# Altium PCB PICkit_2.PcbDoc (part 2 of 2)
Units mil, origin at the board's own origin, x right, y up, seen from the top; angles counter-clockwise.
Board outline 6000 x 4000 mil, 2 copper layers (Top Layer, Bottom Layer); 48 components, 38 nets, 142 pads, 0 vias.
Unrouted connection lines stored in the file: 48.
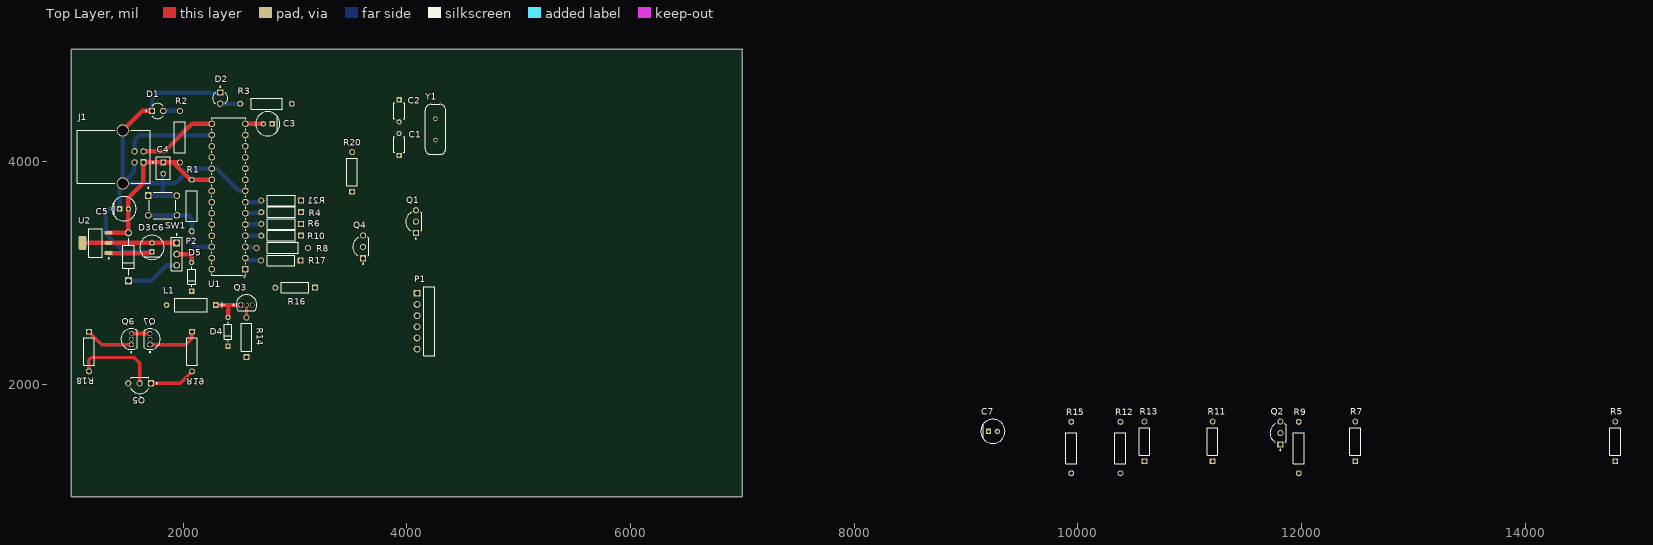
[diagram p0: Top Layer view]

## Part data (continued)
R14: library part CMP-1659-00075-1, "Axial Resistor, 1 KOhm, +/- 1%, 250 mW, -55 to 155 degC, 2-Pin THD, RoHS, Bulk", Case/Package=Axial, Manufacturer=Yageo, Max Operating Temperature="155 degC", Max Power Dissipation=250mW, Min Operating Temperature="-55 degC", Package Quantity=200, Power Rating="250 mW", Resistance=1k, Resistor Type="Metal Film", Supplier Part Number 1=1.00KXBK-ND, Temperature Coefficient=100ppm/°C, Tolerance=1%, Voltage Rating="250 V", Voltage Rating (DC)=200V, Case\Package=Axial, Category="Through-Hole Resistors", ComponentLink1Description="Manufacturer URL", ComponentLink1URL=http://www.yageo.com/, ComponentLink2Description=Datasheet, ComponentLink2URL=http://www.yageo.com/documents/recent/Yageo%20LR_MFR_2013.pdf, ComponentLink3Description=https://datasheet.ciiva.com/25646/yageolr-mfr-2013-25646206.pdf?src-supplier=Digi-Key, ComponentLink3URL=https://datasheet.ciiva.com/25646/yageolr-mfr-2013-25646206.pdf?src-supplier=Digi-Key, DatasheetVersion=Apr-13, Lead Diameter=0.6mm, Lead Free="Lead Free", Length="0.248 inch", Manufacturer Part Number=MFR-25FBF52-1K, Mount="Through Hole", Number of Terminations=2, PackageDescription="2-Pin Axial Lead, Dia 2.4 mm, Body Length 6.3 mm", PackageReference=MFR-25, Packaging=Bulk, Pricing 1="1=0.10000, 10=0.08100, 25=0.05600, 50=0.04360, 100=0.03110, 250=0.02428, 500=0.01928, 1000=0.01369, 5000=0.01058 (USD)", RoHS=Yes, RoHS Compliant=Yes, RoHSCompliant=true, Series=MFR, Stock 1=104756, Supplier 1=Digi-Key, Termination=Axial, Width=6.3mm
R16: library part CMP-1659-00075-1, "Axial Resistor, 1 KOhm, +/- 1%, 250 mW, -55 to 155 degC, 2-Pin THD, RoHS, Bulk", Case/Package=Axial, Manufacturer=Yageo, Max Operating Temperature="155 degC", Max Power Dissipation=250mW, Min Operating Temperature="-55 degC", Package Quantity=200, Power Rating="250 mW", Resistance=820R, Resistor Type="Metal Film", Supplier Part Number 1=1.00KXBK-ND, Temperature Coefficient=100ppm/°C, Tolerance=1%, Voltage Rating="250 V", Voltage Rating (DC)=200V, Case\Package=Axial, Category="Through-Hole Resistors", ComponentLink1Description="Manufacturer URL", ComponentLink1URL=http://www.yageo.com/, ComponentLink2Description=Datasheet, ComponentLink2URL=http://www.yageo.com/documents/recent/Yageo%20LR_MFR_2013.pdf, ComponentLink3Description=https://datasheet.ciiva.com/25646/yageolr-mfr-2013-25646206.pdf?src-supplier=Digi-Key, ComponentLink3URL=https://datasheet.ciiva.com/25646/yageolr-mfr-2013-25646206.pdf?src-supplier=Digi-Key, DatasheetVersion=Apr-13, Lead Diameter=0.6mm, Lead Free="Lead Free", Length="0.248 inch", Manufacturer Part Number=MFR-25FBF52-1K, Mount="Through Hole", Number of Terminations=2, PackageDescription="2-Pin Axial Lead, Dia 2.4 mm, Body Length 6.3 mm", PackageReference=MFR-25, Packaging=Bulk, Pricing 1="1=0.10000, 10=0.08100, 25=0.05600, 50=0.04360, 100=0.03110, 250=0.02428, 500=0.01928, 1000=0.01369, 5000=0.01058 (USD)", RoHS=Yes, RoHS Compliant=Yes, RoHSCompliant=true, Series=MFR, Stock 1=104756, Supplier 1=Digi-Key, Termination=Axial, Width=6.3mm
R17: library part CMP-1659-00075-1, "Axial Resistor, 1 KOhm, +/- 1%, 250 mW, -55 to 155 degC, 2-Pin THD, RoHS, Bulk", Case/Package=Axial, Manufacturer=Yageo, Max Operating Temperature="155 degC", Max Power Dissipation=250mW, Min Operating Temperature="-55 degC", Package Quantity=200, Power Rating="250 mW", Resistance=2k7, Resistor Type="Metal Film", Supplier Part Number 1=1.00KXBK-ND, Temperature Coefficient=100ppm/°C, Tolerance=1%, Voltage Rating="250 V", Voltage Rating (DC)=200V, Case\Package=Axial, Category="Through-Hole Resistors", ComponentLink1Description="Manufacturer URL", ComponentLink1URL=http://www.yageo.com/, ComponentLink2Description=Datasheet, ComponentLink2URL=http://www.yageo.com/documents/recent/Yageo%20LR_MFR_2013.pdf, ComponentLink3Description=https://datasheet.ciiva.com/25646/yageolr-mfr-2013-25646206.pdf?src-supplier=Digi-Key, ComponentLink3URL=https://datasheet.ciiva.com/25646/yageolr-mfr-2013-25646206.pdf?src-supplier=Digi-Key, DatasheetVersion=Apr-13, Lead Diameter=0.6mm, Lead Free="Lead Free", Length="0.248 inch", Manufacturer Part Number=MFR-25FBF52-1K, Mount="Through Hole", Number of Terminations=2, PackageDescription="2-Pin Axial Lead, Dia 2.4 mm, Body Length 6.3 mm", PackageReference=MFR-25, Packaging=Bulk, Pricing 1="1=0.10000, 10=0.08100, 25=0.05600, 50=0.04360, 100=0.03110, 250=0.02428, 500=0.01928, 1000=0.01369, 5000=0.01058 (USD)", RoHS=Yes, RoHS Compliant=Yes, RoHSCompliant=true, Series=MFR, Stock 1=104756, Supplier 1=Digi-Key, Termination=Axial, Width=6.3mm
R18 R20 R21: library part CMP-1659-00075-1, "Axial Resistor, 1 KOhm, +/- 1%, 250 mW, -55 to 155 degC, 2-Pin THD, RoHS, Bulk", Case/Package=Axial, Manufacturer=Yageo, Max Operating Temperature="155 degC", Max Power Dissipation=250mW, Min Operating Temperature="-55 degC", Package Quantity=200, Power Rating="250 mW", Resistance=10k, Resistor Type="Metal Film", Supplier Part Number 1=1.00KXBK-ND, Temperature Coefficient=100ppm/°C, Tolerance=1%, Voltage Rating="250 V", Voltage Rating (DC)=200V, Case\Package=Axial, Category="Through-Hole Resistors", ComponentLink1Description="Manufacturer URL", ComponentLink1URL=http://www.yageo.com/, ComponentLink2Description=Datasheet, ComponentLink2URL=http://www.yageo.com/documents/recent/Yageo%20LR_MFR_2013.pdf, ComponentLink3Description=https://datasheet.ciiva.com/25646/yageolr-mfr-2013-25646206.pdf?src-supplier=Digi-Key, ComponentLink3URL=https://datasheet.ciiva.com/25646/yageolr-mfr-2013-25646206.pdf?src-supplier=Digi-Key, DatasheetVersion=Apr-13, Lead Diameter=0.6mm, Lead Free="Lead Free", Length="0.248 inch", Manufacturer Part Number=MFR-25FBF52-1K, Mount="Through Hole", Number of Terminations=2, PackageDescription="2-Pin Axial Lead, Dia 2.4 mm, Body Length 6.3 mm", PackageReference=MFR-25, Packaging=Bulk, Pricing 1="1=0.10000, 10=0.08100, 25=0.05600, 50=0.04360, 100=0.03110, 250=0.02428, 500=0.01928, 1000=0.01369, 5000=0.01058 (USD)", RoHS=Yes, RoHS Compliant=Yes, RoHSCompliant=true, Series=MFR, Stock 1=104756, Supplier 1=Digi-Key, Termination=Axial, Width=6.3mm
R19: library part CMP-1659-00075-1, "Axial Resistor, 1 KOhm, +/- 1%, 250 mW, -55 to 155 degC, 2-Pin THD, RoHS, Bulk", Case/Package=Axial, Manufacturer=Yageo, Max Operating Temperature="155 degC", Max Power Dissipation=250mW, Min Operating Temperature="-55 degC", Package Quantity=200, Power Rating="250 mW", Resistance=100R, Resistor Type="Metal Film", Supplier Part Number 1=1.00KXBK-ND, Temperature Coefficient=100ppm/°C, Tolerance=1%, Voltage Rating="250 V", Voltage Rating (DC)=200V, Case\Package=Axial, Category="Through-Hole Resistors", ComponentLink1Description="Manufacturer URL", ComponentLink1URL=http://www.yageo.com/, ComponentLink2Description=Datasheet, ComponentLink2URL=http://www.yageo.com/documents/recent/Yageo%20LR_MFR_2013.pdf, ComponentLink3Description=https://datasheet.ciiva.com/25646/yageolr-mfr-2013-25646206.pdf?src-supplier=Digi-Key, ComponentLink3URL=https://datasheet.ciiva.com/25646/yageolr-mfr-2013-25646206.pdf?src-supplier=Digi-Key, DatasheetVersion=Apr-13, Lead Diameter=0.6mm, Lead Free="Lead Free", Length="0.248 inch", Manufacturer Part Number=MFR-25FBF52-1K, Mount="Through Hole", Number of Terminations=2, PackageDescription="2-Pin Axial Lead, Dia 2.4 mm, Body Length 6.3 mm", PackageReference=MFR-25, Packaging=Bulk, Pricing 1="1=0.10000, 10=0.08100, 25=0.05600, 50=0.04360, 100=0.03110, 250=0.02428, 500=0.01928, 1000=0.01369, 5000=0.01058 (USD)", RoHS=Yes, RoHS Compliant=Yes, RoHSCompliant=true, Series=MFR, Stock 1=104756, Supplier 1=Digi-Key, Termination=Axial, Width=6.3mm
SW1: "6 x 6 mm, 4.3 ~ 17 mm Actuator Height, 100 ~ 260 gf, Through Hole, SPST, Tactile Switch", Manufacturer="CUI Devices", Supplier Part Number 1=2223-TS02-66-60-BK-100-LCR-D-ND, Category="Tactile Switches", Manufacturer Part Number=TS02-66-60-BK-100-LCR-D, Pricing 1="1=0.10000, 10=0.10000, 25=0.09440, 100=0.08580, 250=0.08068, 500=0.07384, 1000=0.06181, 3000=0.06009, 5000=0.05666 (USD)", RoHS=No, Stock 1=949, Supplier 1=Digi-Key
U1: "Microcontroller, 32 Kb Flash, 2048 Ram, 256 EEPROM, 24 I/o, SPDIP-28", Case/Package=DIP, Frequency=48MHz, Manufacturer=Microchip, Max Operating Temperature=85°C, Max Power Dissipation=1W, Max Supply Voltage=5.5V, Min Operating Temperature=-40°C, Min Supply Voltage=4.2V, Nominal Supply Current=1.1mA, Package Quantity=15, Supplier Part Number 1=PIC18F2550-I/SP-ND, Access Time=48us, Address Bus Width=8b, Category=Microcontrollers, ComponentLink1Description=https://datasheet.ciiva.com/19459/2177651-19459972.pdf?src-supplier=Jameco, ComponentLink1URL=https://datasheet.ciiva.com/19459/2177651-19459972.pdf?src-supplier=Jameco, ComponentLink2Description=https://datasheet.ciiva.com/14131/cepic18f25-data-en-14131789.pdf?src-supplier=Distrelec, ComponentLink2URL=https://datasheet.ciiva.com/14131/cepic18f25-data-en-14131789.pdf?src-supplier=Distrelec, ComponentLink3Description=https://datasheet.ciiva.com/7774/39632e-7774525.pdf?src-supplier=Element14, ComponentLink3URL=https://datasheet.ciiva.com/7774/39632e-7774525.pdf?src-supplier=Element14, ComponentLink4Description=https://datasheet.ciiva.com/7180/720550-7180953.pdf?src-supplier=Newark, ComponentLink4URL=https://datasheet.ciiva.com/7180/720550-7180953.pdf?src-supplier=Newark, ComponentLink5Description=https://datasheet.ciiva.com/9244/39632d-9244668.pdf?src-supplier=Avnet, ComponentLink5URL=https://datasheet.ciiva.com/9244/39632d-9244668.pdf?src-supplier=Avnet, ComponentLink6Description=https://datasheet.ciiva.com/1494/39632e-1494161.pdf?src-supplier=Digi-Key, ComponentLink6URL=https://datasheet.ciiva.com/1494/39632e-1494161.pdf?src-supplier=Digi-Key, Copyright="Copyright (C) 2023 Ultra Librarian. All rights reserved.", Core Architecture=PIC, Data Bus Width=8b, Density=32KB, Height=0.15inch, Interface=I2C,SPI,USB,UART,USART, Lead Free="Lead Free", Length=35.56mm, Manufacturer Part Number=PIC18F2550-I/SP, Manufacturer_Part_Number=PIC18F2550-I/SP, Max Frequency=48MHz, Memory Size=32KB, Memory Type=FLASH, Mfr_Name=Microchip, Mount="Through Hole", Number of A/D Converters=1, Number of ADC Channels=10, Number of Bits=8, Number of I2C Channels=1, Number of I/Os=24, Number of Pins=28, Number of Programmable I/O=24, Number of PWM Channels=2, Number of SPI Channels=1, Number of Timers/Counters=4, Number of UART Channels=1, Oscillator Type=Internal, Packaging=Rail/Tube, Peripherals="PWM,Brown-out Detect/Reset,POR,WDT,HLVD,I2C", Pricing 1="1=8.04000 (USD)", Radiation Hardening=No, RAM Size=2KB, Reach SVHC Compliant=Yes, RefDes=RefDes, RoHS=Yes, RoHS Compliant=Yes, Stock 1=2922, Supplier 1=Digi-Key, Supply Current=1.1mA, Type=DEV, Watchdog Timer=Yes, Weight=0.02lb, Width=0.295inch
U2: library part CMP-12756-000043-1, "IC REG LINEAR 3.3V 1A SOT223", Case/Package=TO-261-4, Dropout Voltage=1.2V, Manufacturer=Diodes, Max Operating Temperature=125°C, Min Current Limit=1A, Min Operating Temperature=-40°C, Output Current=800mA, Output Voltage=3.3V, Supplier Part Number 1=AZ1117IH-3.3TRG1DICT-ND, Category="Voltage Regulators - Linear", ComponentLink1Description=https://www.diodes.com/assets/Datasheets/AZ1117I.pdf?src-supplier=Digi-Key, ComponentLink1URL=https://www.diodes.com/assets/Datasheets/AZ1117I.pdf?src-supplier=Digi-Key, Manufacturer Part Number=AZ1117IH-3.3TRG1, Mount="Surface Mount", Number of Pins=3, Number of Regulators=1, Packaging="Tape and Reel", Pricing 1="1=0.40000, 10=0.32100, 25=0.29360, 100=0.21840, 250=0.19796, 500=0.16384, 1000=0.12288 (USD)", RoHS=Yes, RoHS Compliant=Yes, Stock 1=73174, Supplier 1=Digi-Key
Y1: "Crystal 20MHz ±30ppm (Tol) ±50ppm (Stability) 20pF FUND 30Ohm 2-Pin HC-49/USX Thru-Hole Bulk", ESR (Equivalent Series Resistance)=30R, Frequency=20MHz, Frequency Stability=50ppm, Frequency Tolerance=30ppm, Load Capacitance=20pF, Manufacturer="ECS International", Max Operating Temperature=70°C, Min Operating Temperature=-10°C, Package Quantity=200, Supplier Part Number 1=X1076-ND, Category=Crystals, ComponentLink1Description=https://datasheet.ciiva.com/853/hc-49usx-853344.pdf?src-supplier=Digi-Key, ComponentLink1URL=https://datasheet.ciiva.com/853/hc-49usx-853344.pdf?src-supplier=Digi-Key, Height=0.138inch, Lead Free="Lead Free", Length=0.447inch, Manufacturer Part Number=ECS-200-20-4X, Mount="Through Hole", Packaging=Bulk, Pricing 1="1=0.70000, 10=0.58100, 50=0.52260, 100=0.46460, 500=0.44136, 1000=0.37168, 2500=0.34845, 5000=0.33684, 10000=0.32522 (USD)", RoHS=Yes, Series=HC-49USX, Stock 1=4710, Supplier 1=Digi-Key, Termination=Radial, Tolerance=30ppm, Width=0.183inch

## Nets (pads, with @x,y where several pads share a name; then routed paths per layer and width w, separated by ;. In a path a pad name is that pad's centre, name@x,y a point inside that pad or via, vN(x,y) a via of type N, cw(c..) or ccw(c..) an arc to the next point about the centre after c; other vN are vias at no path point)
+5V_USB: C4.1 C5.2 D3.2 J1.1 R1.2 R2.1 U1.20 U2.3 | length 1599
  Top Layer w40: U2.3 1332.45,3360.28 D3.2@1509.72,3360.28 ; D3.2 D3.2@1509.72,3360.28 ; R2.1 1910,3990 ; U1.20 2065,3835 1910,3990 ; D3.2@1509.69,3360.31 D3.2@1509.72,3360.28 ; D3.2@1509.69,3360.31 1509.69,3574.68 C5.2 1509.37,3674.37 1643.74,3808.74 J1.1 C4.1 1910,3990
GND: C1.1 C2.1 C3.1 C4.2 C5.1 C6.1 C7.1 D1.1 D2.1 J1.4 J1.5 J1.6 P1.3 Q1.1 Q2.1 Q3.3 Q4.1 Q6.3 Q7.3 R9.2 R15.2 R16.1 R17.1 SW1.1 SW1.2 U1.8 U1.19 U2.1 | length 5085.4
  Top Layer w40: U2.1 1692.95,3179.45 1700.51,3187.01 1716.38,3187.01 C6.1 ; J1.6 1632.09,4450 D1.1 ; Q6.3 Q7.3 1701.95,2460.26 Q7.3@1701.59,2460.26
  Bottom Layer w40: J1.6 J1.5 ; J1.4 1561.73,3986.73 1561.73,3905.63 J1.5 ; SW1.1 1815,3693.58 ; C6.1 1469.37,3190.63 1305,3355 1305,3551.57 1328.43,3575 C5.1 1430.63,3755.52 1458.31,3783.2 J1.5 ; D1.1 1720,4560 1775,4615 D2.1 ; C4.2 1817.86,3887.86 1817.86,3805.07 1815,3802.2 ; SW1.2 1815,3693.58 ; U1.8 2495,3735 2298.29,3931.71 2258.29,3931.71 U1.19 2060,3935 1927.2,3802.2 1815,3802.2 ; J1.5 1815,3802.2 ; 1815,3693.58 1815,3802.2
NetC1_2: C1.2 U1.9 Y1.1
NetC2_2: C2.2 U1.10 Y1.2 | length 4.6
  Bottom Layer w40: U1.10 U1.10@2556.76,3936.76 ; C2.2@3928.61,4351.76 C2.2 ; Y1.2@4254.85,4381.06 Y1.2
NetC3_2: C3.2 U1.14 | length 160.6
  Top Layer w40: U1.14 C3.2
NetC6_2: C6.2 P2.1 U2.2 U2.4 | length 844.8
  Top Layer w40: U2.4 U2.2 1512.18,3270 1512.49,3269.68 1719.69,3269.68 C6.2 1721.39,3270.76 1935.76,3270.76 P2.1@1940,3275
NetC7_2: C7.2 D4.1 Q5.3 R12.1 R13.2
NetD1_2: D1.2 R2.2 | length 150
  Bottom Layer w40: D1.2 R2.2
NetD2_2: D2.2 R3.2 | length 180
  Bottom Layer w40: D2.2 R3.2
NetD3_1: D3.1 P2.3 | length 487.2
  Bottom Layer w40: D3.1 1711.81,2931.81 1850,3070 P2.3
NetD4_2: D4.2 L1.1 Q3.1 | length 312
  Top Layer w40: L1.1 2400,2715 ; D4.2 2400,2715 ; 2490,2715 2400,2715
NetD5_1: D5.1 Q1.2 Q2.2 Q4.2 R16.2
NetD5_2: D5.2 L1.2 P1.2 P2.2 R8.1 | length 196.3
  Top Layer w40: P2.2 2051.57,3170 2075,3146.57 D5.2
NetJ1_2: J1.2 U1.15 | length 713.4
  Top Layer w40: J1.2 1831.57,4088.43 2078.14,4335 U1.15
NetJ1_3: J1.3 U1.16 | length 810.2
  Bottom Layer w40: J1.3 1565,4190 1610,4235 U1.16
NetP1_1: P1.1 Q5.1 R19.2 | length 410.7
  Top Layer w30: Q5.1 1972.27,2015 R19.2
NetP1_4: P1.4 R11.1 R15.1
NetP1_5: P1.5 R7.1 R9.1
NetP1_6: P1.6 R5.1
NetQ1_3: Q1.3 R4.1 R5.2
NetQ2_3: Q2.3 R6.1 R7.2
NetQ3_2: Q3.2 R14.2 | length 112
  Top Layer w30: R14.2 Q3.2
NetQ4_3: Q4.3 R10.1 R11.2
NetQ5_2: Q5.2 R13.1 R18.2 | length 765.5
  Top Layer w30: R18.2 1155.97,2223.39 1177.57,2245 1560,2245 1610,2195 Q5.2
NetQ6_1: Q6.1 R18.1 | length 427.1
  Top Layer w30: R18.1 1271.91,2360 Q6.1
NetQ6_2: Q6.2 R20.1
NetQ7_1: Q7.1 R19.1 | length 458.1
  Top Layer w30: Q7.1 2020,2360 2075,2415 2075,2472.06 R19.1
NetQ7_2: Q7.2 R21.1
NetR1_1: R1.1 SW1.3 SW1.4 U1.26 | length 810.5
  Bottom Layer w40: SW1.3 SW1.4 2043.58,3516.42 2075,3485 R1.1 2075,3270 2110,3235 U1.26
NetR3_1: R3.1 U1.11
NetR4_2: R4.2 U1.6 | length 147
  Bottom Layer w40: U1.6 2684.28,3535 2694.28,3545 R4.2
NetR6_2: R6.2 U1.5 | length 144.9
  Bottom Layer w40: U1.5 2689.28,3435 2694.28,3440 R6.2
NetR8_2: R8.2 U1.3 | length 104.1
  Bottom Layer w40: U1.3 2558.06,3231.94 2644.5,3231.94 2651.44,3225 R8.2
NetR10_2: R10.2 U1.4 | length 142.8
  Bottom Layer w40: U1.4 R10.2
NetR12_2: R12.2 R17.2 U1.2 | length 145.5
  Bottom Layer w40: U1.2 2560.14,3135 2581.15,3113.99 R17.2@2691.82,3113.99
NetR14_1: R14.1 U1.12
NetR20_2: R20.2 U1.23
NetR21_2: R21.2 U1.7 | length 149
  Bottom Layer w40: U1.7 2679.28,3635 2694.28,3650 R21.2
pads on no net: U1.1 U1.13 U1.17 U1.18 U1.21 U1.22 U1.24 U1.25 U1.27 U1.28

## Silkscreen, mask and mechanical layers (free items; w line width, h text height)
Mechanical 1:
  lines w10: 1000,1000 5000,1000 5000,5000 1000,5000 1000,1000

## Text inside footprints (layer, text, board x,y; h text height)
U1: Top 3D Body "*" at 2555,3060 h50 r180; Top Overlay "*" at 2567.5,3000.5 h50 r180